# EAGLE board circuitdraft (EAGLE 9.5.2)
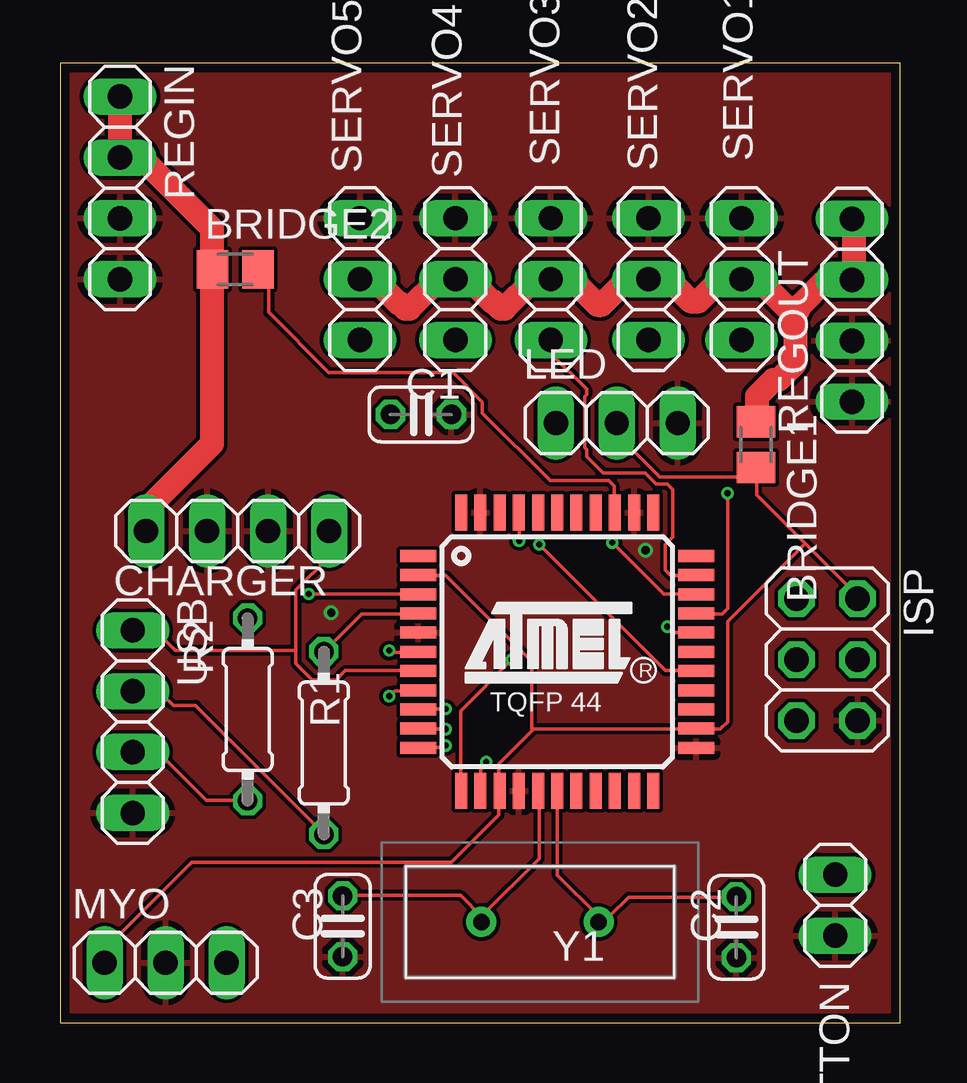
[diagram p0: board, top side]
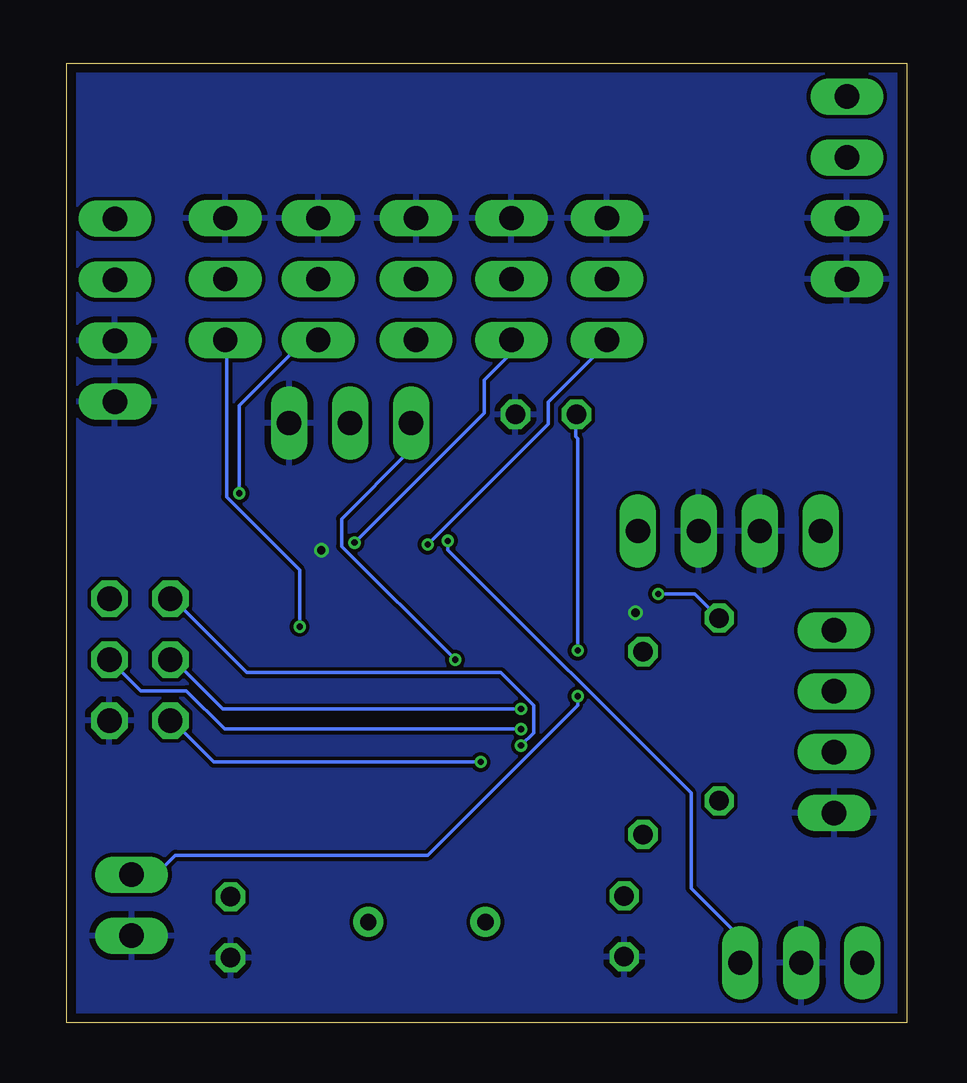
[diagram p1: board, bottom side, seen from below]

Size 35 x 40 mm. Coordinates in mm from the lower left corner, seen from the top.
Outline: 0,0 35,0 35,40 0,40 0,0
Copper layers (1*16): Top 0.035559375mm / dielectric 1.6mm / Bottom 0.035559375mm
Design rules "oshpark-2layer": minimum track width 6mil, minimum drill 10mil, track to track 6mil, track to pad 6mil, pad to pad 6mil, via to via 6mil, smd to smd 6mil, copper to edge 15mil, drill to drill 6mil, minimum pad ring 5mil, minimum via ring 5mil, stop-mask expansion 2.5mil, vias tented up to drill 0mil, thermal gap 10mil
Net classes: 1 power: width 1 mm

## Footprints (pad centres in the part's own frame; a part is rotated, then mirrored left to right if it is on the bottom)
M0805 = smd 1.3 x 1.6: 1 -0.95,0; 2 0.95,0
1X02 = drill 1.016 long: 1 -1.27,0; 2 1.27,0
C025-024X044 = drill 0.813 octagon: 1 -1.27,0; 2 1.27,0
1X04 = drill 1.016 long: 1 -3.81,0; 2 -1.27,0; 3 1.27,0; 4 3.81,0
2X03 = drill 1.016 octagon: 1 -2.54,-1.27; 2 -2.54,1.27; 3 0,-1.27; 4 0,1.27; 5 2.54,-1.27; 6 2.54,1.27
1X03 = drill 1.016 long: 1 -2.54,0; 2 0,0; 3 2.54,0
0204/7 = drill 0.813 octagon: 1 -3.81,0; 2 3.81,0
TQFP44 = smd 1.5 x 0.5: 1 -5.8,4; 2 -5.8,3.2; 3 -5.8,2.4; 4 -5.8,1.6; 5 -5.8,0.8; 6 -5.8,0; 7 -5.8,-0.8; 8 -5.8,-1.6; 9 -5.8,-2.4; 10 -5.8,-3.2; 11 -5.8,-4; 23 5.8,-4; 24 5.8,-3.2; 25 5.8,-2.4; 26 5.8,-1.6; 27 5.8,-0.8; 28 5.8,0; 29 5.8,0.8; 30 5.8,1.6; 31 5.8,2.4; 32 5.8,3.2; 33 5.8,4 | smd 0.5 x 1.5: 12 -4,-5.8; 13 -3.2,-5.8; 14 -2.4,-5.8; 15 -1.6,-5.8; 16 -0.8,-5.8; 17 0,-5.8; 18 0.8,-5.8; 19 1.6,-5.8; 20 2.4,-5.8; 21 3.2,-5.8; 22 4,-5.8; 34 4,5.8; 35 3.2,5.8; 36 2.4,5.8; 37 1.6,5.8; 38 0.8,5.8; 39 0,5.8; 40 -0.8,5.8; 41 -1.6,5.8; 42 -2.4,5.8; 43 -3.2,5.8; 44 -4,5.8
CY16BPS = drill 0.68 pad 1.247: 1 -2.44,0; 2 2.44,0

## Placement (x,y rotation side)
BRIDGE1  [M0805]  29,24.1 270 top
BRIDGE2  [M0805]  7.3,31.4 0 top
BUTTON  [1X02]  32.3,4.9 270 top
C1  1 uF  [C025-024X044]  15.04,25.36 0 top
C2  22pF  [C025-024X044]  28.18,3.98 90 top
C3  22 pF  [C025-024X044]  11.78,4.02 90 top
CHARGER  [1X04]  7.4,20.5 180 top
ISP  [2X03]  31.96,15.14 270 top
LED  [1X03]  23.2,25 0 top
MYO  [1X03]  4.4,2.5 0 top
R1  22 Ohms  [0204/7]  10.99,11.66 90 top
R2  22 Ohms  [0204/7]  7.82,13.06 90 top
REGIN  [1X04]  2.5,34.8 270 top
REGOUT  [1X04]  33,29.7 90 top
SERVO1  [1X03]  28.4,31 90 top
SERVO2  [1X03]  24.52,31 90 top
SERVO3  [1X03]  20.45,31 90 top
SERVO4  [1X03]  16.48,31 90 top
SERVO5  [1X03]  12.5,31 90 top
U$1  ATMEGA32U4-AU  [TQFP44]  20.72,15.46 0 top
USB  [1X04]  3.03,12.55 270 top
Y1  CY16BPS  [CY16BPS]  20,4.2 0 top

## Library data of the parts
BRIDGE1 BRIDGE2 R1 R2 = rcl; SPICEPREFIX: R
BUTTON CHARGER ISP LED MYO REGIN REGOUT SERVO1-SERVO5 USB = pinhead
C1-C3 = rcl; SPICEPREFIX: C
U$1 = mega32U4
Y1 = SamacSys_Parts; DESCRIPTION: Crystals 16MHz 20pF 0C +70C; HEIGHT: 5mm; MANUFACTURER_NAME: Crystek; MANUFACTURER_PART_NUMBER: CY16BPS; MOUSER_PART_NUMBER: 549-CY16BPS; MOUSER_PRICE-STOCK: https://www.mouser.com/Search/Refine.aspx?Keyword=549-CY16BPS

## Nets
BIGPOWER [power]: BRIDGE1.1 REGOUT.3 REGOUT.4 SERVO1.2 SERVO2.2 SERVO3.2 SERVO4.2 SERVO5.2
D+: R1.1 USB.2
D-: R2.1 USB.3
DATAIN: LED.1 U$1.12
GND: BUTTON.2 C1.2 C2.1 C3.1 CHARGER.2 CHARGER.3 ISP.6 LED.3 MYO.2 REGIN.3 REGIN.4 REGOUT.1 REGOUT.2 SERVO1.3 SERVO2.3 SERVO3.3 SERVO4.3 SERVO5.3 U$1.5 U$1.15 U$1.23 U$1.35 U$1.43 USB.4
INT: U$1.25
INTERRUPT: BUTTON.1 U$1.8
MISO: ISP.1 U$1.11
MOSI: ISP.4 U$1.10
N$1: MYO.3 U$1.41
N$2: R2.2 U$1.3
N$3: C1.1 U$1.6
N$4: R1.2 U$1.4
N$5: C2.2 U$1.17 Y1.2
N$6: C3.2 U$1.16 Y1.1
N$9: BRIDGE2.2 U$1.36
POWER: BRIDGE1.2 ISP.2 LED.2 MYO.1 U$1.2 U$1.14 U$1.24
RST: ISP.5 U$1.13
SCK: ISP.3 U$1.9
SCL: U$1.18
SDA: U$1.19
SIGNAL1: SERVO1.1 U$1.29
SIGNAL2: SERVO2.1 U$1.30
SIGNAL3: SERVO3.1 U$1.32
SIGNAL4: SERVO4.1 U$1.31
SIGNAL5: SERVO5.1 U$1.27
STAT: U$1.26
VBAT [power]: BRIDGE2.1 CHARGER.4 REGIN.1 REGIN.2
VBUS: CHARGER.1 U$1.7 USB.1

## Tracks (layer width: path | path; a pad name or v marks a point on that pad's centre or on a via)
BIGPOWER
  Top 1: REGOUT.4 33.07,33.5 33.07,30.98 REGOUT.3 32.54,30.91 31.85,30.91 30.86,29.92 30.63,29.46 | 30.63,29.46 30.56,29.38 30.56,29 30.63,28.93 30.63,28.01 30.56,27.94 30.56,27.56 30.63,27.48 29.95,26.79 29.72,26.79 29.03,26.11 29.03,25.12 BRIDGE1.1 | 30.63,29.46 29.11,30.98 28.42,30.98 SERVO1.2 27.97,30.83 27.36,30.83 26.59,30.07 26.29,30.07 25.53,30.83 24.99,30.83 SERVO2.2 24.46,30.98 23.62,30.98 22.56,29.92 22.4,29.92 21.34,30.98 20.96,30.98 SERVO3.2 20.42,30.98 19.74,30.98 18.52,29.77 18.36,29.77 18.06,30.07 17.98,30.07 17.3,30.76 16.92,30.76 SERVO4.2 16.46,30.98 15.77,30.98 14.55,29.77 14.4,29.77 14.17,29.99 14.1,29.99 13.11,30.98 12.57,30.98 SERVO5.2
D+
  Top 0.152: R1.1 10.97,7.9 5.64,13.23 4.72,13.23 4.19,13.76 3.05,13.76 USB.2
D-
  Top 0.152: R2.1 7.77,9.27 6.1,9.27 4.12,11.25 3.05,11.25 USB.3
DATAIN  (via drill 0.25)
  Top 0.152: v18.82,15.14 16.69,13 16.69,9.72 U$1.12
  Bottom 0.152: v18.82,15.14 23.55,19.86 23.55,21 20.73,23.82 20.73,24.96 LED.1
GND  (via drill 0.35)
  other vias: 11.3,17.1 24.4,19.7
  pour Top: -8.5,55.8 42,55.8 42,-7.1 -8.5,-7.1
  pour Bottom: -10.7,58.5 43.5,58.5 43.5,-8.2 -10.7,-8.2
INTERRUPT  (via drill 0.25)
  Top 0.152: v13.72,13.61 13.95,13.84 14.86,13.84 U$1.8
  Bottom 0.152: v13.72,13.61 13.72,13.23 19.96,6.98 30.48,6.98 31.24,6.22 32.23,6.22 BUTTON.1
MISO  (via drill 0.25)
  Top 0.152: v16.08,11.55 16,11.48 14.94,11.48 U$1.11
  Bottom 0.152: v16.08,11.55 15.55,12.09 15.55,13.23 16.92,14.6 27.51,14.6 30.63,17.73 ISP.1
MOSI  (via drill 0.25)
  Top 0.152: v16.08,12.24 14.94,12.24 U$1.10
  Bottom 0.152: v16.08,12.24 28.42,12.24 30.02,13.84 31.93,13.84 ISP.4
N$1  (via drill 0.25)
  Top 0.152: v19.13,20.09 19.13,21.23 U$1.41
  Bottom 0.152: v19.13,20.09 19.13,19.71 8.99,9.57 8.99,5.61 7.01,3.63 7.01,2.56 MYO.3
N$2  (via drill 0.25)
  Top 0.152: v10.36,17.88 14.86,17.88 U$1.3
  Bottom 0.152: v10.36,17.88 8.84,17.88 7.85,16.89 R2.2
N$3  (via drill 0.25)
  Top 0.152: v13.72,15.52 13.79,15.44 14.86,15.44 U$1.6
  Bottom 0.152: v13.72,15.52 13.72,24.36 13.79,24.43 13.79,25.35 C1.1
N$4
  Top 0.152: U$1.4 14.86,17.04 12.57,17.04 11.05,15.52 R1.2
N$5
  Top 0.152: 22.4,4.47 20.73,6.14 20.73,9.65 U$1.17 | 22.4,4.47 22.4,4.24 Y1.2 22.4,4.47 | 22.4,4.47 22.94,4.47 23.7,5.23 28.12,5.23 C2.2
N$6
  Top 0.152: 17.6,4.39 17.6,4.24 Y1.1 17.6,4.39 | 17.6,4.39 17.6,4.47 19.96,6.83 19.96,9.65 U$1.16 | 17.6,4.39 16.69,5.31 11.81,5.31 C3.2
N$9
  Top 0.152: U$1.36 23.09,21.31 23.09,22.38 22.86,22.6 20.42,22.6 17.6,25.42 17.6,25.88 16.38,27.1 11.2,27.1 8.69,29.61 8.69,30.98 8.31,31.37 BRIDGE2.2
POWER
  Top 0.152: 29.03,22.76 29.03,21.99 31.05,19.97 | 29.03,22.76 29.03,23.14 BRIDGE1.2 29.03,22.76 | 31.05,19.97 33.3,17.73 ISP.2 | 29.03,22.76 24.99,22.76 23.24,24.51 23.24,24.96 LED.2 | 19.7,12.2 19.74,12.24 26.52,12.24 U$1.24 26.59,12.24 27.51,12.24 27.81,12.54 27.81,16.74 31.05,19.97 | 19.7,12.2 18.29,10.79 18.29,9.72 U$1.14 18.29,9.65 18.29,8.66 16.31,6.68 5.49,6.68 1.91,3.1 1.91,2.56 MYO.1 | U$1.2 14.94,18.64 16.08,18.64 19.66,15.06 19.66,12.24 19.7,12.2
RST  (via drill 0.25)
  Top 0.152: v17.76,10.87 17.53,10.64 17.53,9.72 U$1.13
  Bottom 0.152: v17.76,10.87 28.88,10.87 30.63,12.62 ISP.5
SCK  (via drill 0.25)
  Top 0.152: v16.08,13.08 14.94,13.08 U$1.9
  Bottom 0.152: v16.08,13.08 28.5,13.08 30.63,15.21 ISP.3
SIGNAL1  (via drill 0.25)
  Top 0.152: v25.3,16.51 25.53,16.28 26.52,16.28 U$1.29
  Bottom 0.152: v25.3,16.51 25.3,18.87 28.35,21.92 28.35,28.39 SERVO1.1
SIGNAL2  (via drill 0.25)
  Top 0.152: v27.81,22.07 27.81,17.27 27.59,17.04 26.59,17.04 U$1.30
  Bottom 0.152: v27.81,22.07 27.81,25.73 25.15,28.39 24.54,28.39 SERVO2.1
SIGNAL3
  Top 0.152: U$1.32 26.52,18.64 25.45,18.64 25.22,18.87 25.22,19.94 25.53,20.24 25.53,22.22 25.3,22.45 24.84,22.45 24.38,22.91 22.63,22.91 21.95,23.59 21.95,23.9 21.87,23.98 21.87,26.11 21.95,26.18 21.95,26.41 20.5,27.86 20.5,28.39 SERVO3.1
SIGNAL4  (via drill 0.25)
  Top 0.152: v23.01,20.01 25.15,17.88 26.52,17.88 U$1.31
  Bottom 0.152: v23.01,20.01 17.6,25.42 17.6,26.79 16.54,27.86 16.54,28.39 SERVO4.1
SIGNAL5  (via drill 0.25)
  Top 0.152: v19.96,19.94 25.22,14.68 26.52,14.68 U$1.27
  Bottom 0.152: v19.96,19.94 14.94,24.96 14.94,25.88 12.57,28.24 12.57,28.39 SERVO5.1
VBAT
  Top 1: CHARGER.4 3.66,20.55 3.66,21.46 6.33,24.13 6.33,30.91 BRIDGE2.1 6.33,31.44 6.33,33.12 3.43,36.01 2.52,36.01 REGIN.2 2.52,36.55 2.52,38.6 REGIN.1
VBUS
  Top 0.152: 9.83,15.52 9.83,18.03 11.2,19.4 11.2,20.47 CHARGER.1 | 9.83,15.52 9.83,14.98 10.52,14.3 11.51,14.3 11.89,14.68 14.86,14.68 U$1.7 | 9.83,15.52 4.8,15.52 3.96,16.36 3.05,16.36 USB.1